# EAGLE board power_v2 (EAGLE 9.6.1)
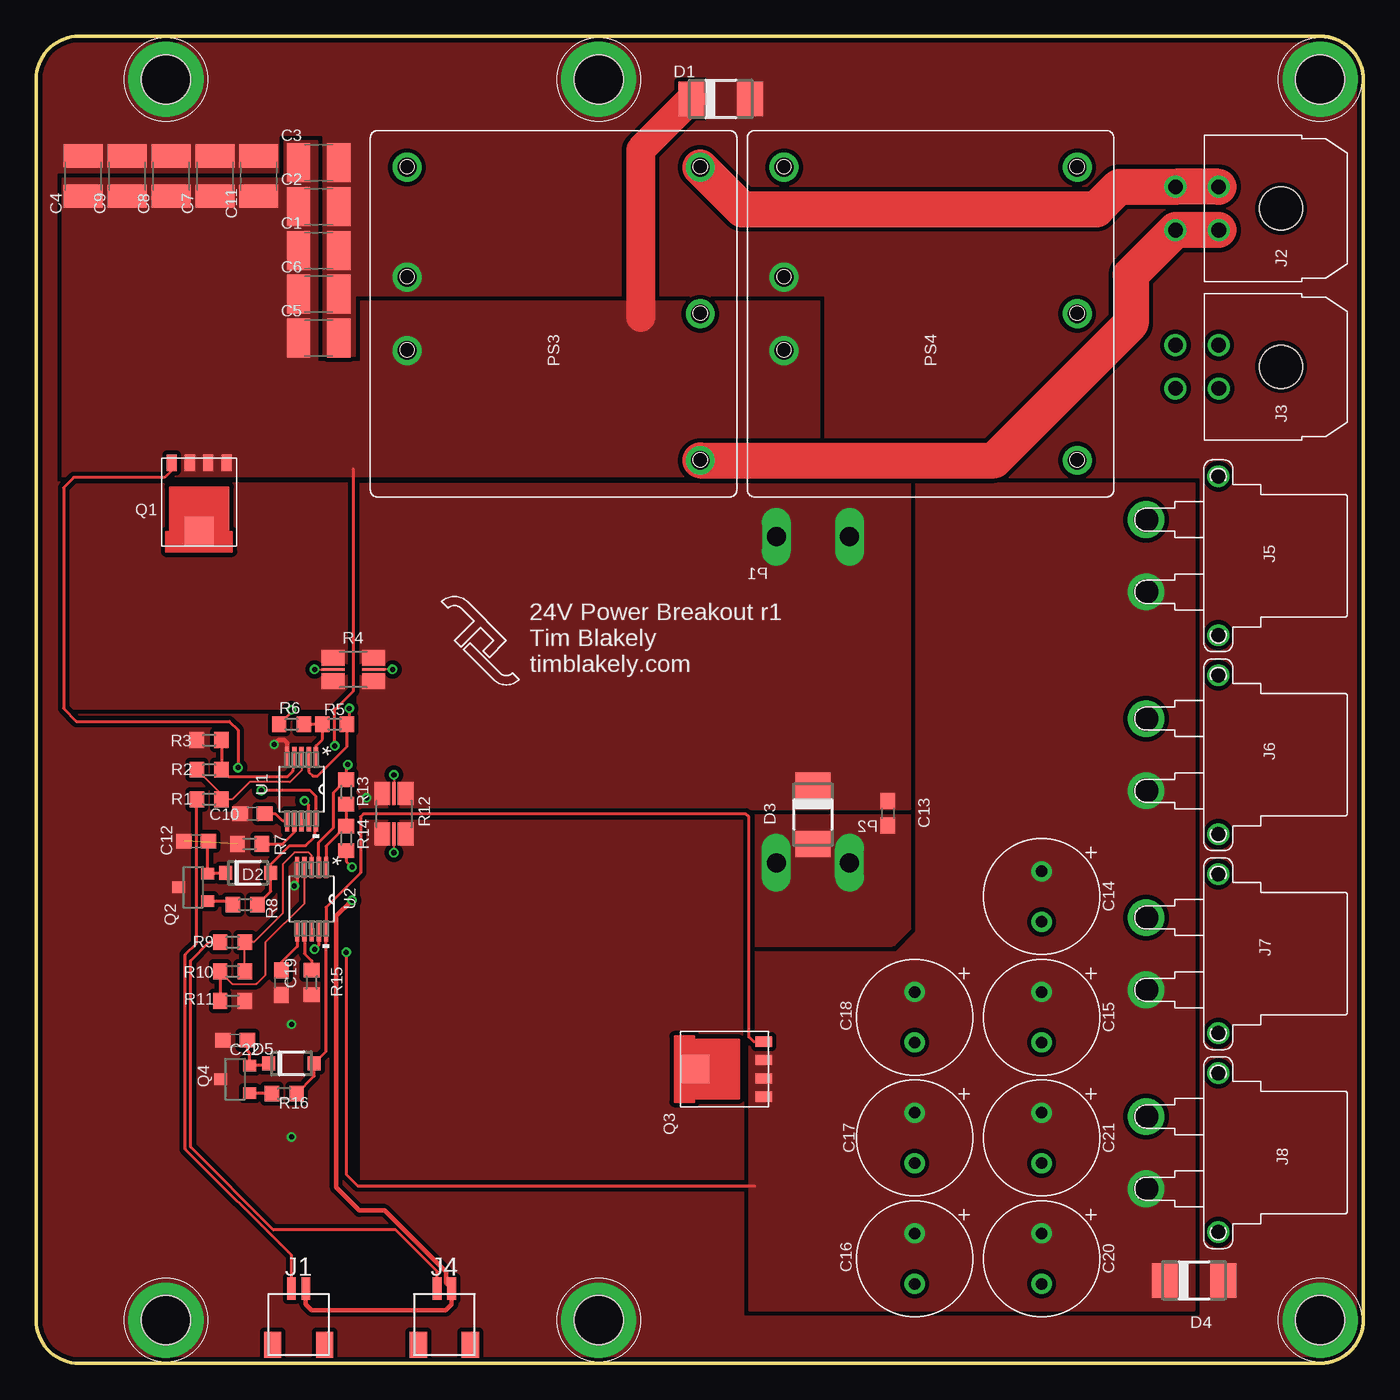
[diagram p0: board, top side]
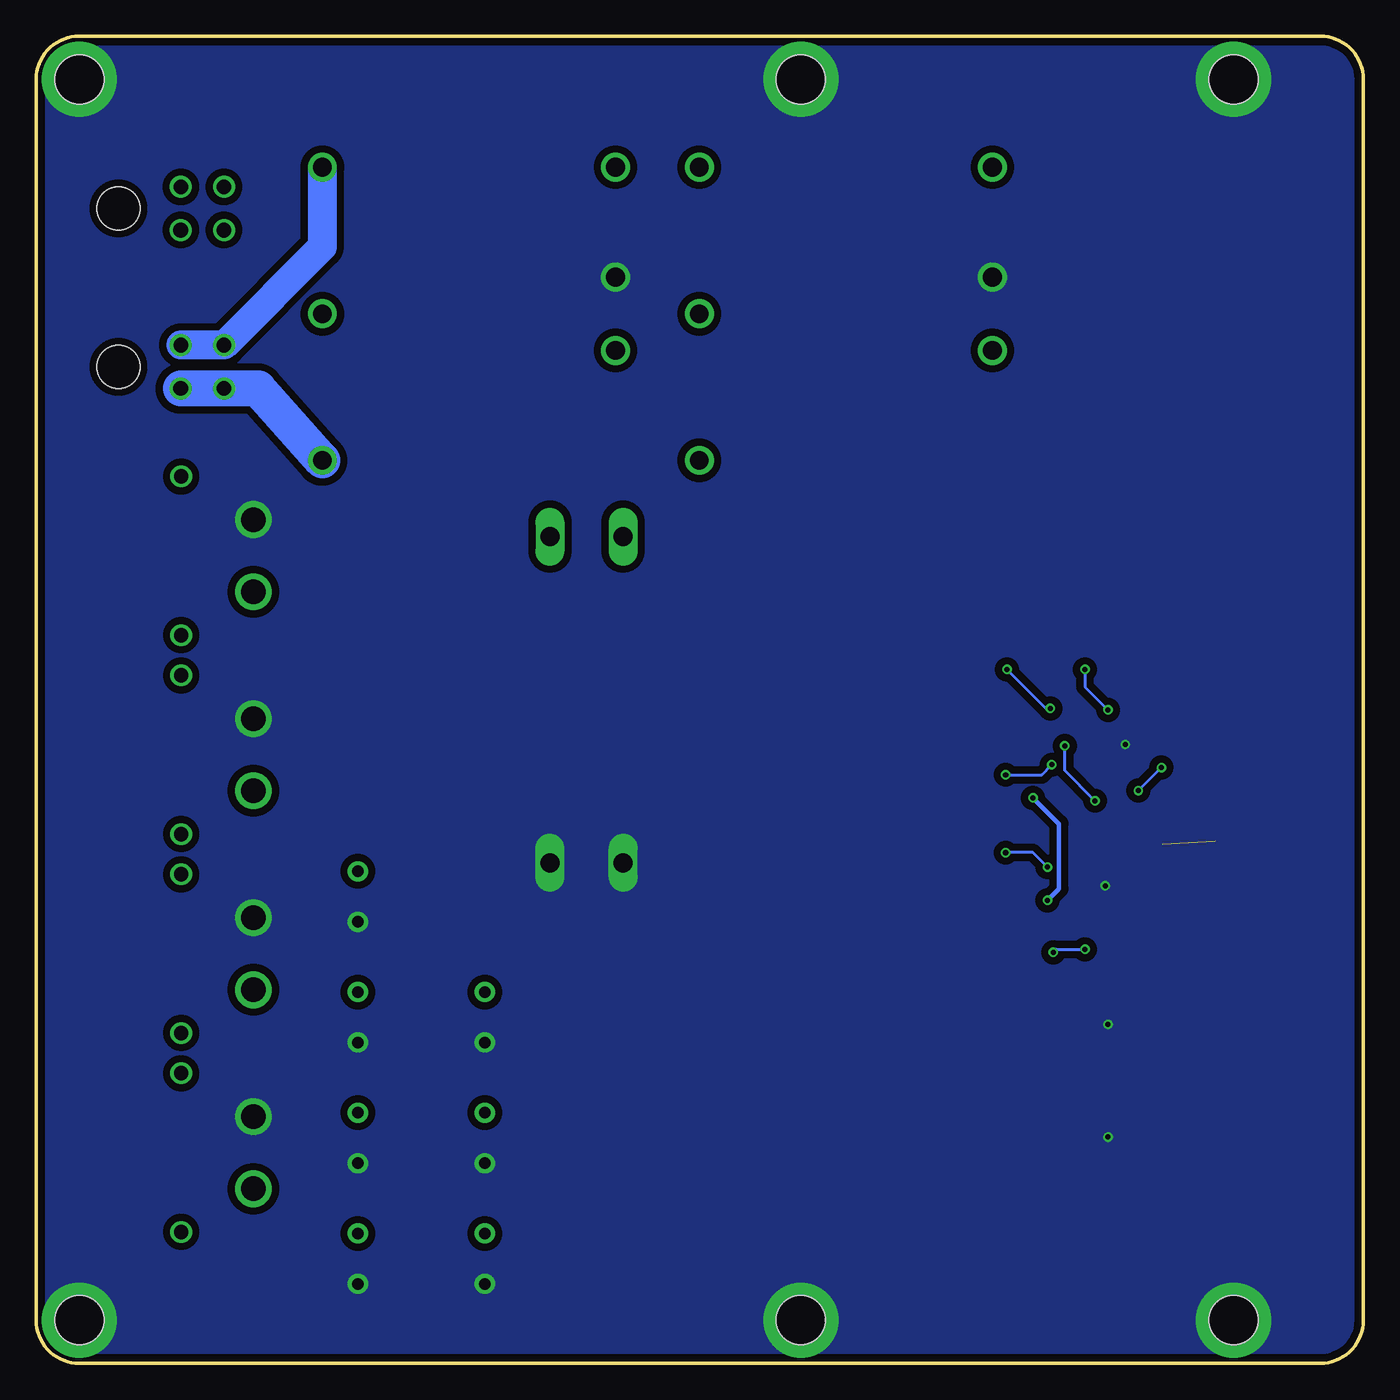
[diagram p1: board, bottom side, seen from below]

Size 92 x 92 mm. Coordinates in mm from the lower left corner, seen from the top.
Outline: 0,89 0,3 arc90 3,0 89,0 arc90 92,3 92,89 arc90 89,92 3,92 arc90 0,89
Copper layers (1*2*15*16): Top 0.035mm / dielectric 0.11mm / Route2 0.035mm / dielectric 1.13mm / Route15 0.035mm / dielectric 0.11mm / Bottom 0.035mm
Design rules "pcbway_4_layer": minimum track width 6mil, minimum drill 0.3mm, track to track 6mil, track to pad 6mil, pad to pad 6mil, via to via 6mil, smd to smd 6mil, copper to edge 0.25mm, drill to drill 10mil, minimum pad ring 6mil, minimum via ring 6mil, stop-mask expansion 2mil, vias tented up to drill 0mil, thermal gap 10mil
Net classes: 0 default: drill 0.3 mm; 1 power plane: width 0.305 mm, clearance 0.5 mm
Holes 3.4 mm at 39,89 9,89 9,3 39,3 89,3 89,89

## Footprints (pad centres in the part's own frame; a part is rotated, then mirrored left to right if it is on the bottom)
C1210 = smd 1.6 x 2.7: 1 -1.4,0; 2 1.4,0
C0603 = smd 1.1 x 1: 1 -0.85,0; 2 0.85,0
C_ELEC_8X11_5 = drill 0.8 pad 1.4: 1 -1.75,0; 2 1.75,0
DO-214AC = smd 1.8 x 2.4: A 2.025,0; C -2.025,0
SOD123 = smd 0.9 x 0.95: A 1.575,0; C -1.575,0
HOLE_GND_M3 = drill 3.2 pad 5.2: P$1 0,0
JST_SM02B-SRSS-TB = smd 0.6 x 1.55: 1 0.5,0.8; 2 -0.5,0.8 | smd 1.2 x 1.8: PAD1 1.8,-3.1; PAD2 -1.8,-3.1
MOLEX_4_RA = drill 1.016: CIRCUIT1 1.5,4.32; CIRCUIT2 -1.5,4.318; CIRCUIT3 1.5,7.32; CIRCUIT4 -1.5,7.32 | hole 3: 0,0
XT30PW-F = drill 1.7: P$1 -2.5,-5; P$2 2.5,-5 | drill 1: P$3 5.5,0; P$4 -5.5,0
FASTON_1289-ST = drill 1.32 pad 2 long: P$1 -2.54,0; P$2 2.54,0
PDQ30-D = drill 1.3 pad 2: P$1 -2.54,10.16; P$2 2.54,10.16; P$3 -10.16,-10.16; P$4 0,-10.16; P$5 10.16,-10.16; P$6 10.16,10.16
LFPAK56E = smd 0.7 x 1.15: 1 -1.905,-2.725; 2 -0.635,-2.725; 3 0.635,-2.725; 4 1.905,-2.725 | smd 2 x 2: 5 0,2.032
SOT23-3 = smd 0.8 x 0.9: B -0.95,-1; C 0,1; E 0.95,-1
R0603 = smd 1 x 1.1: 1 -0.85,0; 2 0.85,0
R1210_KELVIN = smd 1.6 x 0.229: 1_KELVIN -1.4,0; 2_KELVIN 1.4,0 | smd 1.6 x 1.1: 1A -1.4,0.8; 1B -1.4,-0.8; 2A 1.4,0.8; 2B 1.4,-0.8
VSSOP_DGS_10 = smd 1.45 x 0.3: 1 -2.2,1; 2 -2.2,0.5; 3 -2.2,0; 4 -2.2,-0.5; 5 -2.2,-1; 6 2.2,-1; 7 2.2,-0.5; 8 2.2,0; 9 2.2,0.5; 10 2.2,1

## Placement (x,y rotation side)
C1  2.2nF  [C1210]  19.59,77.14 0 top
C2  10uF  [C1210]  19.59,80.18 0 top
C3  10uF  [C1210]  19.59,83.22 0 top
C4  10uF  [C1210]  3.28,82.29 90 top
C5  10uF  [C1210]  19.59,71.06 0 top
C6  10uF  [C1210]  19.59,74.1 0 top
C7  10uF  [C1210]  12.4,82.29 90 top
C8  10uF  [C1210]  9.36,82.29 90 top
C9  10uF  [C1210]  6.32,82.29 90 top
C10  2.2nF  [C0603]  15,38.1 180 top
C11  10uF  [C1210]  15.44,82.29 90 top
C12  47nF  [C0603]  11.1,36.2 180 top
C13  10nF  [C0603]  59.03,38.15 270 top
C14  220uf  [C_ELEC_8X11_5]  69.7,32.36 270 top
C15  220uf  [C_ELEC_8X11_5]  69.7,23.99 270 top
C16  220uf  [C_ELEC_8X11_5]  60.9,7.26 270 top
C17  220uf  [C_ELEC_8X11_5]  60.9,15.63 270 top
C18  220uf  [C_ELEC_8X11_5]  60.9,23.99 270 top
C19  2.2nF  [C0603]  17,26.4 270 top
C20  220uf  [C_ELEC_8X11_5]  69.7,7.26 270 top
C21  220uf  [C_ELEC_8X11_5]  69.7,15.63 270 top
C22  47nF  [C0603]  13.8,22.4 180 top
D1  SK510A-LTP  [DO-214AC]  47.45,87.64 0 top
D2  1N4148W-7-F  [SOD123]  14.7,34 0 top
D3  SMAJ30A  [DO-214AC]  53.85,38.05 270 top
D4  SK510A-LTP  [DO-214AC]  80.26,5.75 0 top
D5  1N4148W-7-F  [SOD123]  17.7,20.8 0 top
H1  GND_HOLE_M3  [HOLE_GND_M3]  89,3 0 top
H2  GND_HOLE_M3  [HOLE_GND_M3]  39,3 0 top
H3  GND_HOLE_M3  [HOLE_GND_M3]  9,3 0 top
H4  GND_HOLE_M3  [HOLE_GND_M3]  9,89 0 top
H5  GND_HOLE_M3  [HOLE_GND_M3]  39,89 0 top
H6  GND_HOLE_M3  [HOLE_GND_M3]  89,89 0 top
J1  LINEAR_2_JST_SH_RA  [JST_SM02B-SRSS-TB]  18.2,4.4 0 top
J2  12v  [MOLEX_4_RA]  86.29,80.05 90 top
J3  5v  [MOLEX_4_RA]  86.29,69.08 90 top
J4  LINEAR_2_JST_SH_RA  [JST_SM02B-SRSS-TB]  28.3,4.4 0 top
J5  XT30PW-F  [XT30PW-F]  81.94,55.98 270 top
J6  XT30PW-F  [XT30PW-F]  81.94,42.19 270 top
J7  XT30PW-F  [XT30PW-F]  81.94,28.4 270 top
J8  XT30PW-F  [XT30PW-F]  81.94,14.61 270 top
P1  FASTON1289_ST  [FASTON_1289-ST]  53.85,57.3 180 bottom
P2  FASTON1289_ST  [FASTON_1289-ST]  53.85,34.7 0 bottom
PS3  PDQ30-Q24-S12-D  [PDQ30-D]  35.87,72.75 90 top
PS4  PDQ30-Q24-S5-D  [PDQ30-D]  62,72.75 90 top
Q1  PSMN1R0-40YSH  [LFPAK56E]  11.3,59.7 180 top
Q2  MMBT5401L  [SOT23-3]  10.9,33 90 top
Q3  PSMN1R0-40YSH  [LFPAK56E]  47.7,20.4 90 top
Q4  MMBT5401L  [SOT23-3]  13.8,19.7 90 top
R1  47.5k  [R0603]  12,39.1 0 top
R2  3.4k  [R0603]  12,41.15 0 top
R3  4.32k  [R0603]  12,43.2 180 top
R4  0.002  [R1210_KELVIN]  22,48.1 180 top
R5  10  [R0603]  20.7,44.3 0 top
R6  4.53  [R0603]  17.7,44.3 0 top
R7  27K  [R0603]  14.8,36 180 top
R8  1k  [R0603]  14.5,31.8 180 top
R9  47.5k  [R0603]  13.61,29.2 0 top
R10  3.4k  [R0603]  13.61,27.17 180 top
R11  4.32k  [R0603]  13.61,25.13 0 top
R12  0.002  [R1210_KELVIN]  24.8,38.1 270 top
R13  10  [R0603]  21.5,39.6 270 top
R14  4.53  [R0603]  21.5,36.4 90 top
R15  27K  [R0603]  19.1,26.41 270 top
R16  1k  [R0603]  17.21,18.7 180 top
U1  LM5069_DGS_10  [VSSOP_DGS_10]  18.4,39.8 270 top
U2  LM5069_DGS_10  [VSSOP_DGS_10]  19.1,32.19 270 top

## Library data of the parts
C1-C9 C11 C14-C18 C20 C21 D1-D5 H1-H6 J2 J3 J5-J8 P1 P2 PS3 PS4 Q1-Q4 R4 R12 U1 U2 = timlib
C10 C12 C13 C19 C22 = rcl; SPICEPREFIX: C
J1 J4 = _T_conn
R1-R3 R5-R11 R13-R16 = rcl; SPICEPREFIX: R

## Nets
5V_GND: J3.CIRCUIT1 J3.CIRCUIT3 PS4.P$5
12V_GND: J2.CIRCUIT1 J2.CIRCUIT3 PS3.P$5
+5VOUT: J3.CIRCUIT2 J3.CIRCUIT4 PS4.P$3
+12VOUT: J2.CIRCUIT2 J2.CIRCUIT4 PS3.P$3
+24V_BATT: C13.1 D3.C J1.1 J4.1 P1.P$1 P1.P$2 R4.1A R4.1B R12.1A R12.1B
+24V_ISO: C1.1 C2.1 C3.1 C4.1 C5.1 C6.1 C7.1 C8.1 C9.1 C11.1 D1.C PS3.P$1 PS4.P$1 Q1.1 Q1.2 Q1.3 U1.9
+24V_POWER: C14.1 C15.1 C16.1 C17.1 C18.1 C20.1 C21.1 D4.C J5.P$2 J6.P$2 J7.P$2 J8.P$2 Q3.1 Q3.2 Q3.3 U2.9
GND_BATT: C1.2 C2.2 C3.2 C4.2 C5.2 C6.2 C7.2 C8.2 C9.2 C10.2 C11.2 C12.2 C13.2 C14.2 C15.2 C16.2 C17.2 C18.2 C19.2 C20.2 C21.2 C22.2 D1.A D3.A D4.A H1.P$1 H2.P$1 H3.P$1 H4.P$1 H5.P$1 H6.P$1 J5.P$1 J6.P$1 J7.P$1 J8.P$1 P2.P$1 P2.P$2 PS3.P$2 PS4.P$2 Q2.C Q4.C R3.2 R7.2 R11.2 R15.2 U1.5 U2.5
MOSFET_DRAIN: Q3.5 R12.2A R12.2B
MOSFET_DRAIN1: Q1.5 R4.2A R4.2B
N$1: R9.2 R10.1 U2.3
N$2: R10.2 R11.1 U2.4
N$3: J4.2 R9.1
N$4: R1.2 R2.1 U1.3
N$5: D5.A Q3.4 R16.1 U2.10
N$6: R15.1 U2.7
N$7: C19.1 U2.6
N$8: C22.1 D5.C Q4.E
N$9: Q4.B R16.2
N$10: R13.2 R14.2 U2.1
N$11: R12.2_KELVIN R14.1
N$12: R2.2 R3.1 U1.4
N$13: J1.2 R1.1
N$14: D2.A Q1.4 R8.1 U1.10
N$15: R7.1 U1.7
N$16: C10.1 U1.6
N$17: C12.1 D2.C Q2.E
N$18: Q2.B R8.2
N$19: R12.1_KELVIN R13.1 U2.2
N$20: R5.1 R6.2 U1.1
N$21: R4.2_KELVIN R6.1
N$22: R4.1_KELVIN R5.2 U1.2

## Tracks (layer width: path | path; a pad name or v marks a point on that pad's centre or on a via)
5V_GND
  Bottom 2: PS4.P$5 72.16,77.39 J3.CIRCUIT3 J3.CIRCUIT1
12V_GND
  Top 2.5: J2.CIRCUIT1 J2.CIRCUIT3 75.05,81.55 73.5,80 48.94,80 PS3.P$5
+5VOUT
  Bottom 2.5: PS4.P$3 76.59,67.58 J3.CIRCUIT4 J3.CIRCUIT2
+12VOUT
  Top 2.5: PS3.P$3 66.39,62.59 75.87,72.07 75.87,75.45 J2.CIRCUIT4 J2.CIRCUIT2
+24V_BATT  (via drill 0.35)
  Top 0.3: J1.1 18.7,4.1 19.1,3.7 28.4,3.7 28.8,4.1 J4.1 28.4,5.6 28.4,6.34 24.14,10.6 22.4,10.6 20.8,12.2 20.8,31 v21.9,32.1
  Bottom 0.3: v21.9,32.1 21.1,32.9 21.1,37.4 v22.9,39.2
  pour Top (isolate 0.3, rank 2, no thermals): 60.6,61 60.6,38.4 22.3,38.4 22.3,61
+24V_ISO  (via drill 0.35)
  Top 0.2: U1.9 18.9,38.7 v18.6,39 | v20.7,42.8 20.7,45.3 22,46.6 22,62
  Top 2: D1.C 41.9,84.11 41.9,72.5
  Bottom 0.2: v18.6,39 20.7,41.1 v20.7,42.8
  pour Top (isolate 0.3, no thermals): 1.8,61.5 54.3,61.5 54.3,73.6 22.5,73.6 22.5,69.4 19.5,69.4 19.5,84.7 17.2,84.7 17.2,82.1 1.8,82.1
+24V_POWER  (via drill 0.35)
  Top 0.2: U2.9 19.6,29 v19.3,28.7 | v21.5,28.5 21.5,13.1 22.3,12.3 49.8,12.3
  Bottom 0.2: v19.3,28.7 21.3,28.7 v21.5,28.5
  pour Top (isolate 0.3, no thermals): 49.4,3.7 80.3,3.7 80.3,61 61,61 61,29.9 59.6,28.5 49.4,28.5
GND_BATT  (via drill 0.35)  (1 unrouted)
  Top 0.2: U2.5 18.1,33.3 v17.9,33.1
  Top 0.3: U1.5 17.4,43 17.2,43.2 16.8,43.2 v16.5,42.9
  other vias: 17.7,23.5 17.7,15.7
  pour Bottom (isolate 0.5, no thermals): -0.6,92.6 92.6,92.6 92.6,-0.3 -0.6,-0.3
  pour Top (isolate 0.3, rank 4, no thermals): -0.5,92.6 92.5,92.6 92.5,-0.2 -0.5,-0.2
  pour Top (isolate 0.3, no thermals): 49.4,29 59.5,29 60.6,30.1 60.6,37.8 49.4,37.8
MOSFET_DRAIN
  pour Top (isolate 0.3, rank 3, no thermals): 49.1,12.6 49.1,37.8 22.5,37.8 22.5,12.6
MOSFET_DRAIN1
  pour Top (isolate 0.3, no thermals): 1.9,61 1.9,45.4 21.7,45.4 21.7,61
N$1
  Top 0.152: U2.3 19.1,35.2 18.88,35.42 17.92,35.42 17.1,34.6 17.1,31.2 15.1,29.2 R9.2 R10.1
N$2
  Top 0.152: R10.2 12.76,27.13 13.58,26.31 15.29,26.31 15.9,26.93 15.9,29.2 18.6,31.9 U2.4
  Top 0.2: R10.2 R11.1
N$3
  Top 0.2: J4.2 27.8,6.38 24.93,9.25 16.45,9.25 10.7,15 10.7,27.9 12,29.2 R9.1
N$4
  Top 0.152: R2.1 12.85,39.45 R1.2 13.6,39.1 14.8,40.3 17.6,40.3 18.4,41.1 U1.3
N$5
  Top 0.2: R16.1 19.27,19.91 D5.A 20.1,21.62 U2.10 20.1,31.62 22.48,34 22.48,37.88 22.7,38.1 49.2,38.1 49.4,37.9 49.4,22.63 49.73,22.3 Q3.4
N$6
  Top 0.2: U2.7 18.6,28.4 19.1,27.9 R15.1
N$7
  Top 0.2: U2.6 18.1,28.9 17,27.8 C19.1
N$8
  Top 0.2: D5.C 15.97,20.65 Q4.E 14.8,21.5 14.65,21.65 C22.1
N$9
  Top 0.2: Q4.B 16.31,18.75 R16.2
N$10
  Top 0.2: U2.1 20.1,35.85 R14.2 R13.2
N$11  (via drill 0.35)
  Top 0.152: v24.8,35.4 R12.2_KELVIN
  Top 0.2: R14.1 21.5,34.8 v21.9,34.4
  Bottom 0.2: v21.9,34.4 22.9,35.4 v24.8,35.4
N$12
  Top 0.2: R3.1 R2.2 13.35,40.65 17.41,40.65 17.8,41.04 U1.4
N$13
  Top 0.2: J1.2 17.7,7.5 10.35,14.85 10.35,28.35 11.12,29.12 11.12,39.08 R1.1
N$14  (via drill 0.35)
  Top 0.2: R8.1 16.27,32.73 D2.A 16.27,34.6 17.57,35.9 18.7,35.9 19.3,36.5 U1.10 19.4,39.3 19,39.7 v15.6,39.7 | Q1.4 9.39,61.9 8.9,61.4 2.6,61.4 1.9,60.7 1.9,45.4 2.8,44.5 13.4,44.5 14,43.9 v14,41.3
  Bottom 0.2: v15.6,39.7 v14,41.3
N$15
  Top 0.2: U1.7 17.9,36.8 17.1,36 R7.1
N$16
  Top 0.2: U1.6 17.1,37.6 16.6,38.1 C10.1
N$17
  Top 0.2: D2.C 11.95,34 Q2.E 11.9,36.15 C12.1
N$18
  Top 0.2: Q2.B 13.4,32.05 R8.2
N$19  (via drill 0.35)
  Top 0.152: v24.8,40.8 R12.1_KELVIN
  Top 0.2: v21.6,41.5 21.5,41.4 R13.1 20.62,39.57 20.62,37.13 19.6,36.11 U2.2
  Bottom 0.2: v24.8,40.8 22.3,40.8 v21.6,41.5
N$20
  Top 0.2: U1.1 19.4,42.8 19.85,43.25 R5.1 R6.2
N$21  (via drill 0.35)
  Top 0.152: v19.3,48.1 R4.2_KELVIN
  Top 0.2: v17.7,45.3 17.7,45.15 R6.1
  Bottom 0.2: v19.3,48.1 19.3,46.9 v17.7,45.3
N$22  (via drill 0.35)
  Top 0.152: v24.7,48.1 R4.1_KELVIN
  Top 0.2: v21.7,45.4 21.7,44.45 R5.2 21.55,42.75 19.5,40.7 19.2,40.7 18.9,41 U1.2
  Bottom 0.2: v24.7,48.1 22,45.4 v21.7,45.4

## Text on the board
tPlace: 24V Power Breakout r1 / Tim Blakely / timblakely.com